# Altium PCB 电机驱动—加密版.PcbDoc
Units mil, origin at the board's own origin, x right, y up, seen from the top; angles counter-clockwise.
Board outline 6000 x 4000 mil, 2 copper layers (Top Layer, Bottom Layer); 66 components, 58 nets, 204 pads, 0 vias.
Unrouted connection lines stored in the file: 140.
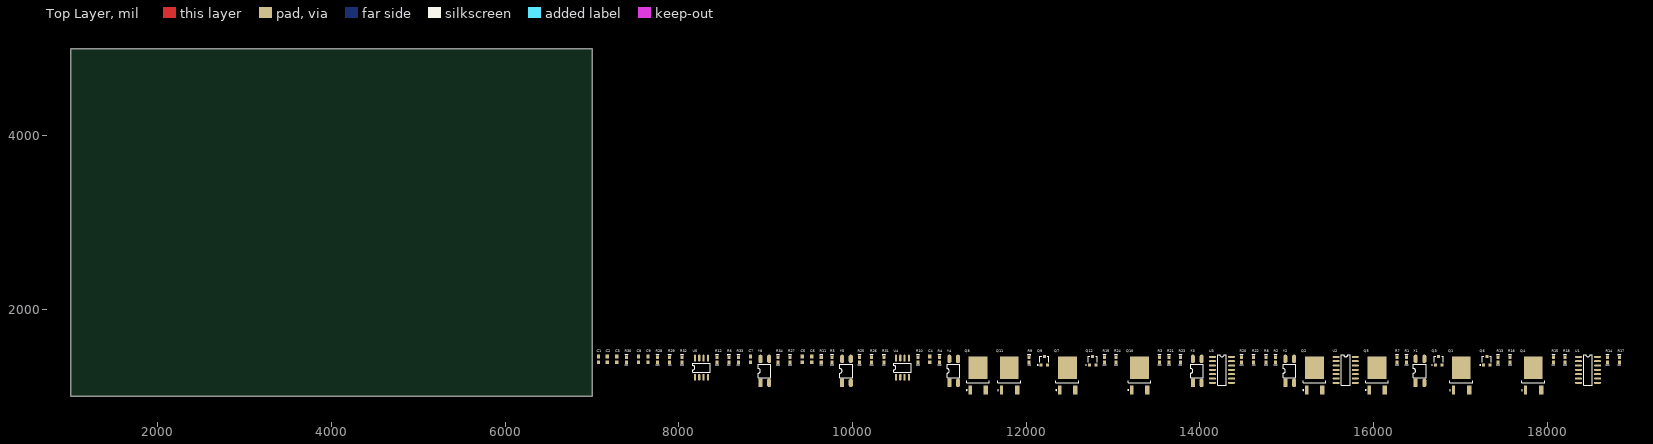
[diagram p0: Top Layer view]
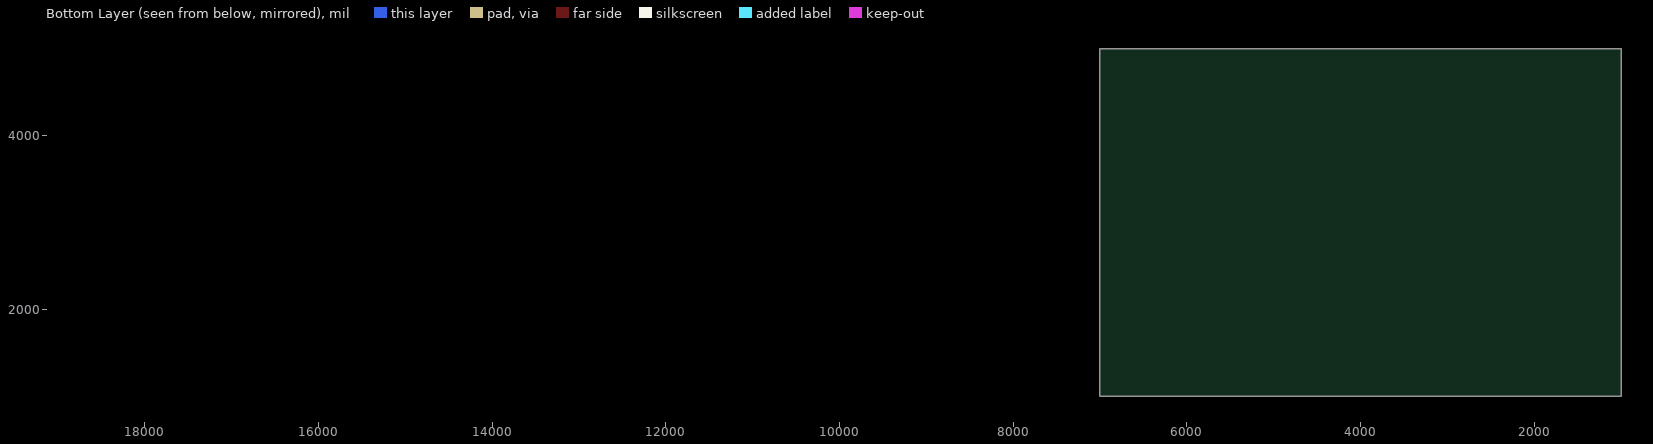
[diagram p1: Bottom Layer view, seen from below]

## Layer stack, top to bottom
Top Layer: signal copper 1.4
Dielectric: dielectric 12.6, FR-4, Dk 4.8
Bottom Layer: signal copper 1.4

## Board outline
1000,1000 7000,1000 7000,5000 1000,5000

## Design rules (kind name [scope] priority, off if disabled: settings)
Clearance [All] p1: gap=10
PolygonConnect [All] p1: connectstyle=Relief reliefconductorwidth=10 reliefentries=4 polygonreliefangle="90 Angle"
RoutingVias [All] p1: holewidth=28 width=50 viastyle="Through Hole" minholewidth=28 minwidth=50 maxholewidth=28 maxwidth=50
SilkscreenOverComponentPads [All] p1: minsilkscreentomaskgap=10
SolderMaskExpansion [All] p1: expansion=4
TestPointUsage [All] p1: valid=0 allowmultiple=FALSE
Testpoint [All] p1: side=15 testpointundercomponent=TRUE minsize=40 maxsize=100 preferedsize=60 minholesize=0 maxholesize=40 preferedholesize=32 testpointgrid=1 style=1023 order=0-112345678
Width [All] p1: maxlimit=10 minlimit=10 preferedwidth=10
23 further rules are at their usual default settings.

## Components (designator, comment, footprint, x,y, rotation, side; value= is the part's Value field where it differs from the comment)
*1 "EL357" EL357 16485,1155 r90 top
*2 "EL357" EL357 14985,1155 r90 top
*3 "EL357" EL357 13920,1155 r90 top
*4 "EL357" EL357 11115,1155 r90 top
*5 "EL357" EL357 9880,1155 r90 top
*6 "EL357" EL357 8940,1155 r90 top
C1 "104" 1608[0603] 7075,1425 r90 top
C2 "104" 1608[0603] 7175,1425 r90 top
C3 "104" 1608[0603] 7285,1425 r90 top
C4 "104" 1608[0603] 10890,1425 r90 top
C5 "102" 1608[0603] 9420,1425 r90 top
C6 "104" 1608[0603] 9530,1425 r90 top
C7 "104" 1608[0603] 8825,1425 r90 top
C8 "102" 1608[0603] 7535,1425 r90 top
C9 "104" 1608[0603] 7645,1425 r90 top
Q1 "PMOS" TO-252AA_M 17010,1245 r90 top
Q2 "NMOS" TO-252AA_M 15320,1245 r90 top
Q3 "8050_NPN" SOT-23 16750,1410 r0 top
Q4 "PMOS" TO-252AA_M 17840,1245 r90 top
Q5 "NMOS" TO-252AA_M 16040,1245 r90 top
Q6 "8050_NPN" SOT-23 17305,1410 r0 top
Q7 "PMOS" TO-252AA_M 12475,1245 r90 top
Q8 "NMOS" TO-252AA_M 11445,1245 r90 top
Q9 "8050_NPN" SOT-23 12210,1410 r0 top
Q10 "PMOS" TO-252AA_M 13305,1245 r90 top
Q11 "NMOS" TO-252AA_M 11805,1245 r90 top
Q12 "8050_NPN" SOT-23 12765,1410 r0 top
R1 "1.2K" 0603-r 16380,1420 r90 top
R2 "1.2K" 0603-r 14870,1420 r90 top
R3 "1.2K" 0603-r 13535,1420 r90 top
R4 "1.2K" 0603-r 11000,1420 r90 top
R5 "1.2K" 0603-r 9765,1420 r90 top
R6 "1.2K" 0603-r 8575,1420 r90 top
R7 "3.3K" 0603-r 16270,1420 r90 top
R8 "3.3K" 0603-r 14760,1420 r90 top
R9 "4.7K" 0603-r 12035,1420 r90 top
R10 "4.7K" 0603-r 10755,1420 r90 top
R11 "4.7K" 0603-r 9640,1420 r90 top
R12 "4.7K" 0603-r 8440,1420 r90 top
R13 "10K" 0603-r 17435,1420 r90 top
R14 "10K" 0603-r 18695,1420 r90 top
R15 "10K" 0603-r 18070,1420 r90 top
R16 "10K" 0603-r 17570,1420 r90 top
R17 "10K" 0603-r 18830,1420 r90 top
R18 "10K" 0603-r 18205,1420 r90 top
R19 "10K" 0603-r 12900,1420 r90 top
R20 "10K" 0603-r 14480,1420 r90 top
R21 "10K" 0603-r 13645,1420 r90 top
R22 "10K" 0603-r 14620,1420 r90 top
R23 "10K" 0603-r 13775,1420 r90 top
R24 "10K" 0603-r 13035,1420 r90 top
R25 "10K" 0603-r 10080,1420 r90 top
R26 "1K" 0603-r 10220,1420 r90 top
R27 "10K" 0603-r 9280,1420 r90 top
R28 "10K" 0603-r 7755,1420 r90 top
R29 "1K" 0603-r 7895,1420 r90 top
R30 "10K" 0603-r 7395,1420 r90 top
R31 "1K" 0603-r 10360,1420 r90 top
R32 "1K" 0603-r 8035,1420 r90 top
R33 "10K" 0603-r 8685,1420 r90 top
R34 "10K" 0603-r 9140,1420 r90 top
U1 "74VHC00" SO-14 18360,1455 r0 top
U2 "74VHC08" SO-14 15570,1455 r0 top
U3 "74VHC08" SO-14 14145,1455 r0 top
U4 "ACS712" SO-8 10500,1220 r90 top
U5 "ACS712" SO-8 8185,1220 r90 top

## Footprints (in the part's own frame and the unit in brackets; to place one, negate y for a bottom-side part, rotate by r counter-clockwise, add the part's x,y. Pads: shape width x height; smd on the part's side, far side on the other; paste and mask are expansions set on the pad)
0603-r [mil]
  rect 40x35 smd: 1(-30,0) 2(30,0)
  silkscreen extent -59,-20 61,20, body extent -33,-16 33,16, height 22
1608[0603] [mm] "Chip Capacitor; Body 1.6 x 0.8 mm (LxW typ)"
  rect 1.1x1 smd: 1(-0.85,0) 2(0.85,0)
EL357 [mm]
  rect 2.5x1.2 smd: 1(0,0)
  oval 2.5x1.2 smd: 2(0,-2.54) 3(7,-2.54) 4(7,0)
  silkscreen extent 1.52,-3.05 5.46,0.64
SO-8 [mil]
  oval 80x24 smd: 1(0,0) 2(0,-50) 3(0,-100) 4(0,-150) 5(220,-150) 6(220,-100) 7(220,-50) 8(220,0)
  silkscreen extent 60,-175 160,25
SO-14 [mil]
  oval 80x24 smd: 1(0,0) 2(0,-50) 3(0,-100) 4(0,-150) 5(0,-200) 6(0,-250) 7(0,-300) 8(220,-300) 9(220,-250) 10(220,-200) 11(220,-150) 12(220,-100) 13(220,-50) 14(220,0)
  silkscreen extent 60,-325 160,25
SOT-23 [mm] "SOT-23; 3 Leads; Body 3.0 x 2.6 mm, inc. leads (LxW max)"
  rect 0.9x0.95 smd: 1(-0.95,-1.25) 2(0.95,-1.25) 3(0,1.25)
  silkscreen extent -2.07,-1.37 1.3,1.25
TO-252AA_M [mm]
  rect 2.6x0.95 smd: 1(-4.4,2.28)
  rect 2.6x1.3 smd: 3(-4.4,-2.28)
  rect 6.7x5.5 smd: 4(2.15,0)
  silkscreen extent -4.52,-3.35 -1.6,3.43, body extent -4.9,-3.27 5.04,3.27, height 2.39

## Part data
*1 *2 *3 *4 *5 *6 U1 U2 U3 U4 U5: library part Component_1
C1 C2 C3 C4 C5 C6 C7 C8 C9: library part "Cap Semi", "Capacitor (Semiconductor SIM Model)"
Q1 Q2 Q4 Q5 Q7 Q8 Q10 Q11: library part IRLR7843
Q3 Q6 Q9 Q12: library part 2N3904, "NPN General Purpose Amplifier"
R1 R2 R3 R4 R5 R6 R7 R8 R9 R10 R11 R12 R13 R14 R15 R16 R17 R18 R19 R20 R21 R22 R23 R24 R25 R26 R27 R28 R29 R30 R31 R32 R33 R34: library part RES

## Nets (pads, with @x,y where several pads share a name; then routed paths per layer and width w, separated by ;. In a path a pad name is that pad's centre, name@x,y a point inside that pad or via, vN(x,y) a via of type N, cw(c..) or ccw(c..) an arc to the next point about the centre after c; other vN are vias at no path point)
4Y: U1.11 U3.4
12V: Q1.4 Q4.4 Q7.4 Q10.4 R14.2 R17.2 R20.2 R22.2
AENA: *1.3 R7.1 U1.1 U1.2 U1.4 U1.5 U2.1 U2.2 U2.13
AENB: *1.4 *2.4 *3.4 *4.4 *5.4 *6.4 C1.2 C2.2 C3.2 C4.2 C7.2 U1.9 U1.10 U1.12 U1.13 U1.14 U2.14 U3.1 U3.2 U3.13 U3.14 U4.8 U5.8
AGND1: Q2.3 Q5.3 R31.2 R34.2 U4.1 U4.2
AGND2: Q8.3 Q11.3 R32.2 R33.2 U5.1 U5.2
AIN1: *3.3 R9.1 U2.5
AIN2: *5.3 R11.1 U2.12
AIN3: *4.3 R10.1 U3.5
AIN4: *6.3 R12.1 U3.12
CC1: C6.2 R26.2 R31.1
CC2: C9.2 R29.2 R32.1
ENA: *1.2
ENB: *2.2
GND: C1.1 C2.1 C3.1 C4.1 C5.1 C6.1 C7.1 C8.1 C9.1 Q3.1 Q6.1 Q9.1 Q12.1 R7.2 R8.2 R9.2 R10.2 R11.2 R12.2 R27.1 R30.1 R33.1 R34.1 U1.7 U2.7 U3.7 U4.3 U4.4 U4.5 U5.3 U5.4 U5.5
H1: R13.1 U2.3
H2: Q2.1 U2.6
H3: R16.1 U1.6
H4: Q5.1 U2.11
H5: R19.1 U3.3
H6: Q8.1 U3.6
H7: R24.1 U1.8
H8: Q11.1 U3.11
IN1: *3.2
IN2: *5.2
IN3: *4.2
IN4: *6.2
MOTA1: Q1.3 Q2.4
MOTA2: Q4.3 Q5.4
MOTB1: Q7.3 Q8.4
MOTB2: Q10.3 Q11.4
Net*1_1: *1.1 R1.2
Net*2_1: *2.1 R2.2
Net*2_3: *2.3 R8.1
Net*3_1: *3.1 R3.2
Net*4_1: *4.1 R4.2
Net*5_1: *5.1 R5.2
Net*6_1: *6.1 R6.2
NetC5_2: C5.2 U4.6
NetC8_2: C8.2 U5.6
NetQ1_1: Q1.1 R15.2
NetQ3_2: Q3.2 R13.2
NetQ3_3: Q3.3 R14.1 R15.1
NetQ4_1: Q4.1 R18.2
NetQ6_2: Q6.2 R16.2
NetQ6_3: Q6.3 R17.1 R18.1
NetQ7_1: Q7.1 R21.2
NetQ9_2: Q9.2 R19.2
NetQ9_3: Q9.3 R20.1 R21.1
NetQ10_1: Q10.1 R23.2
NetQ12_2: Q12.2 R24.2
NetQ12_3: Q12.3 R22.1 R23.1
NetR25_1: R25.1 U4.7
NetR25_2: R25.2 R26.1 R27.2
NetR28_1: R28.1 U5.7
NetR28_2: R28.2 R29.1 R30.2
NetU1_3: U1.3 U2.4
VCC: R1.1 R2.1 R3.1 R4.1 R5.1 R6.1
pads on no net: U2.8 U2.9 U2.10 U3.8 U3.9 U3.10